# EAGLE board Brilliant Crift (EAGLE 9.7.0)

Size 141.69 x 110.13 mm. Coordinates in mm from the lower left corner, seen from the top.
Outline: 0,0 141.69,0 141.69,110.13 0,110.13 0,0
Copper layers (1*16): Top 0.035mm / dielectric 1.5mm / Bottom 0.035mm
Design rules "default": minimum track width 6mil, minimum drill 0.35mm, track to track 6mil, track to pad 6mil, pad to pad 6mil, via to via 6mil, smd to smd 6mil, copper to edge 40mil, drill to drill 6mil, minimum pad ring 10mil, minimum via ring 8mil, stop-mask expansion 4mil, vias tented up to drill 0mil, thermal gap 10mil

## Footprints (pad centres in the part's own frame; a part is rotated, then mirrored left to right if it is on the bottom)
LEDRD254W60D565H860B = drill 0.981 pad 1.581: 1 -1.27,0; 2 1.27,0
RESAD1016W63L850D250B = drill 0.83 pad 1.43: 1 -5.08,0; 2 5.08,0
SWITCH-MOMENTARY-PTH-6.5MM = drill 1.016 pad 1.88: 1 -3.251,2.261; 2 3.251,2.261; 3 -3.251,-2.261; 4 3.251,-2.261
ARDUINO-UNO-R3-SHIELD = drill 1.016 pad 1.88: 3.3V 24.13,-2.54; 5V 24.13,0; A0 24.13,12.7; A1 24.13,15.24; A2 24.13,17.78; A3 24.13,20.32; A4 24.13,22.86; A5 24.13,25.4; AREF -24.13,-13.97; D2 -24.13,20.32; D3 -24.13,17.78; D4 -24.13,15.24; D5 -24.13,12.7; D6 -24.13,10.16; D7 -24.13,7.62; D8 -24.13,3.81; D9 -24.13,1.27; D10 -24.13,-1.27; D11 -24.13,-3.81; D12 -24.13,-6.35; D13 -24.13,-8.89; GND@0 24.13,2.54; GND@1 24.13,5.08; GND@2 -24.13,-11.43; IOREF 24.13,-7.62; NC 24.13,-10.16; RES 24.13,-5.08; RX -24.13,25.4; SCL -24.13,-19.05; SDA -24.13,-16.51; TX -24.13,22.86; VIN 24.13,7.62

## Placement (x,y rotation side)
D4  RED  [LEDRD254W60D565H860B]  134.35,22.45 180 top
R2  220  [RESAD1016W63L850D250B]  133.02,8.97 270 top
S1  SWITCH_MOMENTARY  [SWITCH-MOMENTARY-PTH-6.5MM]  73.34,23.76 90 top
S2  SWITCH_MOMENTARY  [SWITCH-MOMENTARY-PTH-6.5MM]  83.7,25.98 90 top
U1_MASTER  ARDUINO-UNO-R3-SHIELD  [ARDUINO-UNO-R3-SHIELD]  29.84,59.5 180 top
U2_SLAVE  ARDUINO-UNO-R3-SHIELD  [ARDUINO-UNO-R3-SHIELD]  111.84,62.25 180 top

## Library data of the parts
D4 = Tinkercad; CATEGORY: Opto-Electronic; SUB-CATEGORY: LED; VALUE: LED_RED
R2 S1 S2 U1_MASTER U2_SLAVE = Tinkercad

## Nets
D4_C: D4.2 R2.1
U1_MASTER_A4: U1_MASTER.A4 U2_SLAVE.A4
U1_MASTER_D2: S1.2 U1_MASTER.D2
U1_MASTER_D3: S2.2 U1_MASTER.D3
U2_SLAVE_A5: U1_MASTER.A5 U2_SLAVE.A5
U2_SLAVE_D9: D4.1 U2_SLAVE.D9
U2_SLAVE_GND: R2.2 S1.3 S2.3 U1_MASTER.GND@0 U1_MASTER.GND@1 U1_MASTER.GND@2 U2_SLAVE.GND@0 U2_SLAVE.GND@1 U2_SLAVE.GND@2

## Tracks (layer width: path | path; a pad name or v marks a point on that pad's centre or on a via)
D4_C  (1 unrouted)
U1_MASTER_A4  (1 unrouted)
U1_MASTER_D2  (1 unrouted)
U1_MASTER_D3  (1 unrouted)
U2_SLAVE_A5  (1 unrouted)
U2_SLAVE_D9  (1 unrouted)
U2_SLAVE_GND  (8 unrouted)